# Altium PCB Modelo-1.PcbDoc
Units mm, origin at the board's own origin, x right, y up, seen from the top; angles counter-clockwise.
Board outline 68.75 x 36.08 mm, 2 copper layers (Top Layer, Bottom Layer); 12 components, 7 nets, 35 pads, 0 vias.
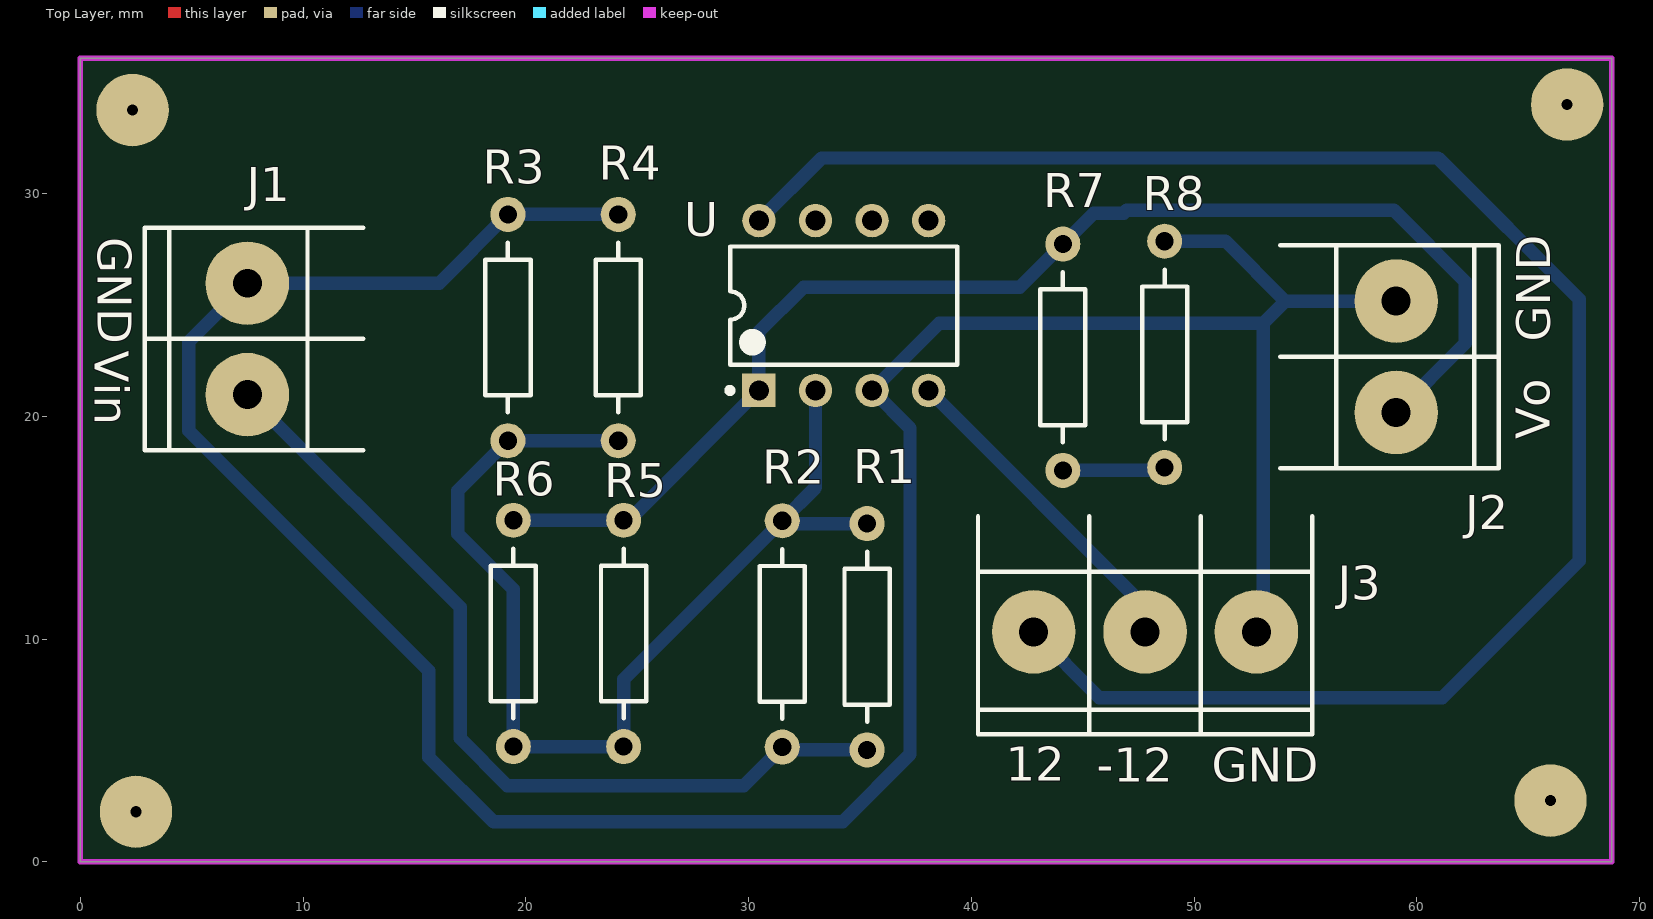
[diagram p0: Top Layer view]
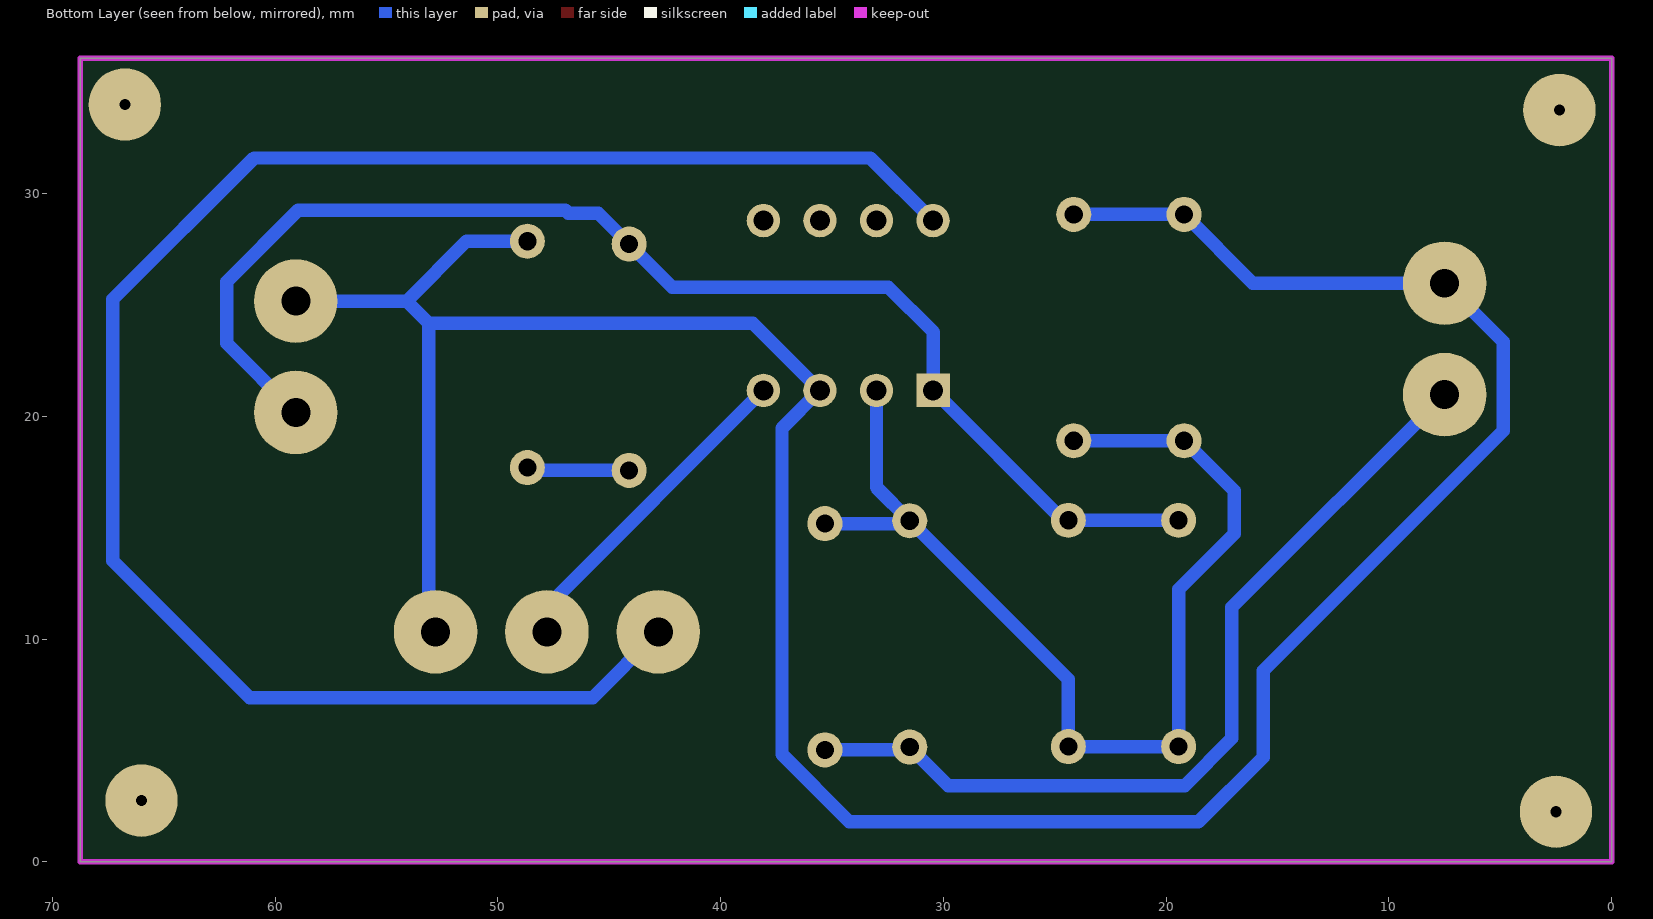
[diagram p1: Bottom Layer view, seen from below]
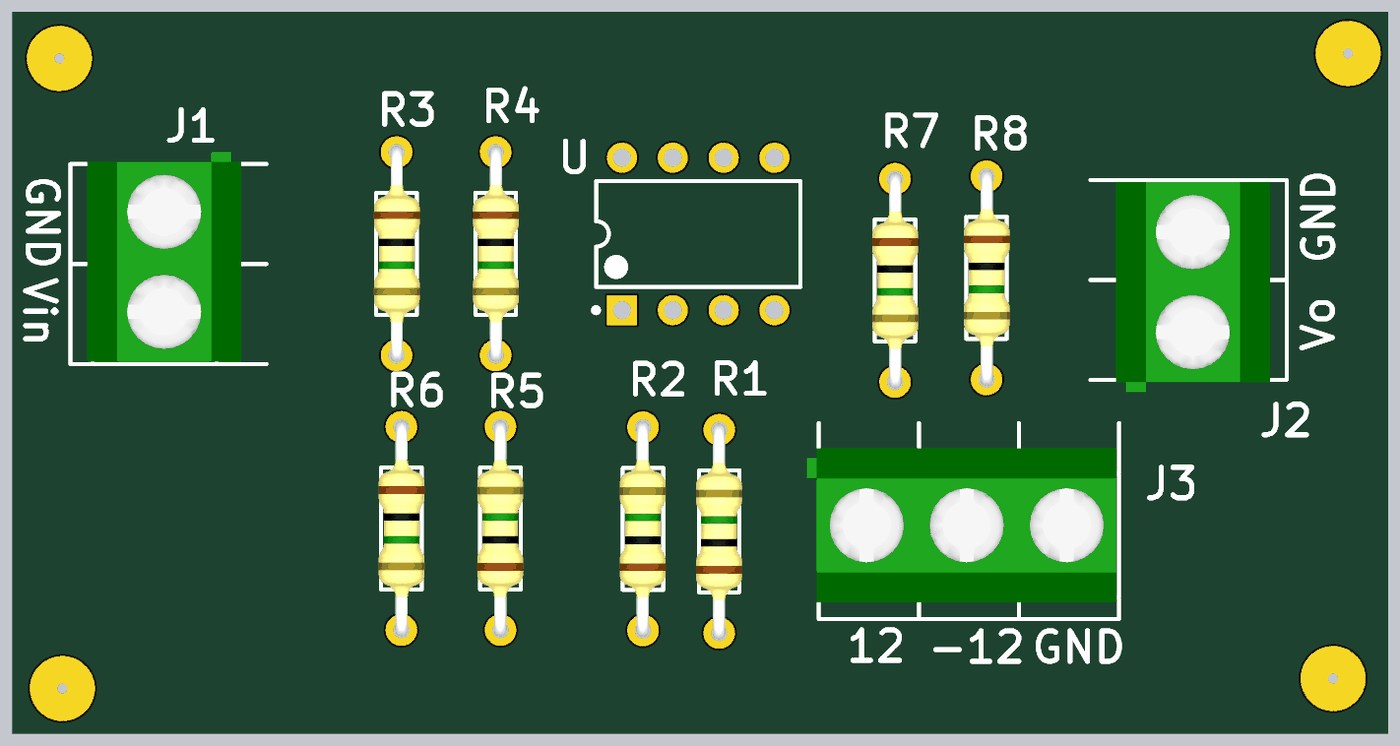
[diagram p2: 3D render of the assembled board from above, using the file's embedded part models]

## Layer stack, top to bottom
Top Solder: solder mask 0.0102, Solder Resist, Dk 3.5
Top Layer: signal copper 0.0356
Dielectric 1: dielectric 0.32, FR-4, Dk 4.8
Bottom Layer: signal copper 0.0356
Bottom Solder: solder mask 0.0102, Solder Resist, Dk 3.5

## Board outline
0,0 0,36.075 68.75,36.075 68.75,0

## Design rules (kind name [scope] priority, off if disabled: settings)
Clearance [All] p1: gap=0.3 ignorepadtopadclearanceinfootprint=FALSE
PolygonConnect [All] p1: connectstyle=Relief reliefconductorwidth=0.254 reliefentries=4 polygonreliefangle="90 Angle" airgapwidth=0.254
RoutingVias [All] p1: holewidth=0.7 width=2 viastyle="Through Hole" minholewidth=0.7 minwidth=2 maxholewidth=0.7 maxwidth=2
SolderMaskExpansion [All] p1: expansion=0.102
Width [All] p1: maxlimit=0.6 minlimit=0.6 preferedwidth=0.6
30 further rules are at their usual default settings.

## Components (designator, comment, footprint, x,y, rotation, side; value= is the part's Value field where it differs from the comment)
J1 "BORNERA 2" BORNERA2 7.5,23.475 r0 top
J2 "BORNERA 2" BORNERA2 59.075,22.675 r180 top
J3 "BORNERA 3" BORNERA3 47.8,10.325 r90 top
R1 "150K" RES400 35.324,5.027 r90 top
R2 "150K" RES400 31.514,5.154 r90 top
R3 "150K" RES400 19.199,29.066 r270 top
R4 "150K" RES400 24.152,29.066 r270 top
R5 "15K" RES400 24.393,5.174 r90 top
R6 "15K" RES400 19.44,15.334 r270 top
R7 "150K" RES400 44.109,27.734 r270 top
R8 "150K" RES400 48.681,27.861 r270 top
U "TL072CP" TI-P8 34.275,24.975 r90 top

## Footprints (in the part's own frame and the unit in brackets; to place one, negate y for a bottom-side part, rotate by r counter-clockwise, add the part's x,y. Pads: shape width x height; smd on the part's side, far side on the other; paste and mask are expansions set on the pad)
BORNERA2 [mm] "Bornera con Tornillos 5mm separación"
  round 3.75 hole 1.3: 1(0,2.5) 2(0,-2.5)
  silkscreen extent -4.6,-5 5.2,5, body extent -3.76,-4.89 3.94,5.61, height 10
BORNERA3 [mm] "Bornera con Tornillos 5mm separación"
  round 3.75 hole 1.3: 1(0,5) 2(0,0) 3(0,-5)
  silkscreen extent -4.6,-7.5 5.2,7.5, body extent -3.76,-7.39 3.94,8.11, height 10.05
RES400 [mil]
  round 62 hole 32: 1(0,0) 2(400,0)
  silkscreen extent 50,-40 350,40, body extent -12,-45 412,46, height 96
TI-P8 [mm] "DIP, 8-Leads, Body 9.59x6.35mm, Pitch 2.54mm"
  rect 1.5x1.5 hole 0.9: 1(-3.81,3.81)
  round 1.5 hole 0.9: 2(-3.81,1.27) 3(-3.81,-1.27) 4(-3.81,-3.81) 5(3.81,-3.81) 6(3.81,-1.27) 7(3.81,1.27) 8(3.81,3.81)
  silkscreen extent -3.93,-5.1 2.65,5.23, body extent -3.95,-5.07 3.95,5.07, height 5.08

## Part data
R1 R2 R3 R4 R5 R6 R7 R8: library part RES
U: "Dual Low-Noise JFET-Input General-Purpose Operational Amplifier, 7 to 36 V, 0 to 70 degC, 8-pin DIP (P8), Pb-Free (RoHS)", Manufacturer="Texas Instruments", Rating=Catalog, Supplier Part Number 1=296-1775-5-ND, Total Supply Voltage(Max)(+5V is 5, +/-5V is 10)=36, Total Supply Voltage(Min)(+5V is 5, +/-5V is 10)=7, CMRR(Min)(dB)=70, Code_JEDEC=MS-001, ComponentLink1Description="Manufacturer URL", ComponentLink1URL=http://www.ti.com/, ComponentLink2Description=Datasheet, ComponentLink2URL=http://www.ti.com/lit/ds/symlink/tl072.pdf, ComponentLink3Description="Package Specification", ComponentLink3URL=http://www.ti.com/litv/pdf/mpdi001b, DatasheetVersion=SLOS080J, Eco-Plan="Pb-Free (RoHS)", GBW(Typ)(MHz)=3, IIB(Max)(pA)=200, Iq per channel(Max)(mA)=2.5, Mounting Technology="Through Hole", Number of Channels=2, Offset Drift(Typ)(uV/C)=18, PackageDescription="8-Pin Plastic In-Line, Body 9.59 x 6.35 mm, Pitch 2.54 mm", PackageReference=P8, PackageVersion="4040082/E, 04/2010", PartNumber=TL072CP, Slew Rate(Typ)(V/us)=13, Sub Family="General Purpose Amplifier, High Supply Voltage Amplifier (>=30V)", Supplier 1=Digi-Key, Supplier 2=Farnell, Supplier 3=Newark, Supplier 4=Mouser, Supplier Part Number 2=1106015, Supplier Part Number 3=60K6988, Supplier Part Number 4=595-TL072CP, Vio (25C)(Max)(mV)=10, Vn at 1kHz(Typ)(nV/rtHz)=18

## Free pads (board coordinates)
  round 3.25 hole 0.5: 2(2.35,33.75) 3(66.75,34) 4(2.5,2.25) 5(66,2.75)

## Nets (pads, with @x,y where several pads share a name; then routed paths per layer and width w, separated by ;. In a path a pad name is that pad's centre, name@x,y a point inside that pad or via, vN(x,y) a via of type N, cw(c..) or ccw(c..) an arc to the next point about the centre after c; other vN are vias at no path point)
-VCC: J3.2 U.4 | length 14.9
  Bottom Layer w0.6: U.4 47.8,11.45 J3.2
GND: J1.1 J2.2 J3.3 R3.1 R4.1 R8.1 U.3 | length 131.6
  Bottom Layer w0.6: R4.1 R3.1 16.108,25.975 J1.1 4.875,23.35 4.875,19.35 15.65,8.575 15.65,4.7 18.55,1.8 34.225,1.8 37.25,4.825 37.25,19.46 U.3 38.555,24.175 53.1,24.175 ; R8.1 51.414,27.861 54.1,25.175 ; J3.3 53.1,10.625 53.1,24.175 ; J2.2 54.1,25.175 ; 53.1,24.175 54.1,25.175
NetJ1_2: J1.2 R1.1 R2.1 | length 39.5
  Bottom Layer w0.6: J1.2 17.05,11.425 17.05,5.55 19.175,3.425 29.785,3.425 R2.1 31.641,5.027 R1.1 R1.1@35.197,5.154
NetJ2_1: J2.1 R5.2 R6.1 R7.1 U.1 | length 59.3
  Bottom Layer w0.6: R6.1 R5.2 24.634,15.334 U.1 30.465,23.79 32.475,25.8 42.175,25.8 R7.1 45.5,29.125 46.846,29.125 46.969,29.248 58.977,29.248 62.175,26.05 62.175,23.275 J2.1 J2.1@58.53,20.72
NetR1_2: R1.2 R2.2 R3.2 R4.2 R5.1 R6.2 U.2 | length 49.2
  Bottom Layer w0.6: R4.2 R3.2 16.95,16.657 16.95,14.725 19.44,12.235 R6.2 R5.1 24.393,8.193 R2.2 ; U.2 33.005,16.805 R2.2 ; R1.2@35.197,15.314 R1.2 31.641,15.187 R2.2
NetR7_2: R7.2 R8.2 | length 4.8
  Bottom Layer w0.6: R7.2@44.236,17.701 R7.2 48.554,17.574 R8.2
VCC: J3.1 U.8 | length 80.6
  Bottom Layer w0.6: U.8 33.28,31.6 60.95,31.6 67.3,25.25 67.3,13.525 61.15,7.375 45.75,7.375 J3.1
pads on no net: U.5 U.6 U.7

## Keep-outs
Keep-Out Layer:
  the board outline again, w0.254

## Silkscreen, mask and mechanical layers (free items; w line width, h text height)
Top Overlay:
  text "GND" at 0.775,28.05 h1.52 r270
  text "GND" at 66,23.35 h1.52 r90
  text "Vin" at 0.65,22.95 h1.52 r270
  text "Vo" at 65.975,18.975 h1.52 r90
  text "12" at 41.55,3.65 h1.52
  text "-12" at 45.625,3.6 h1.52
  text "GND" at 50.8,3.6 h1.52